# EAGLE board SCHEMATIC_EP (EAGLE 9.6.2)
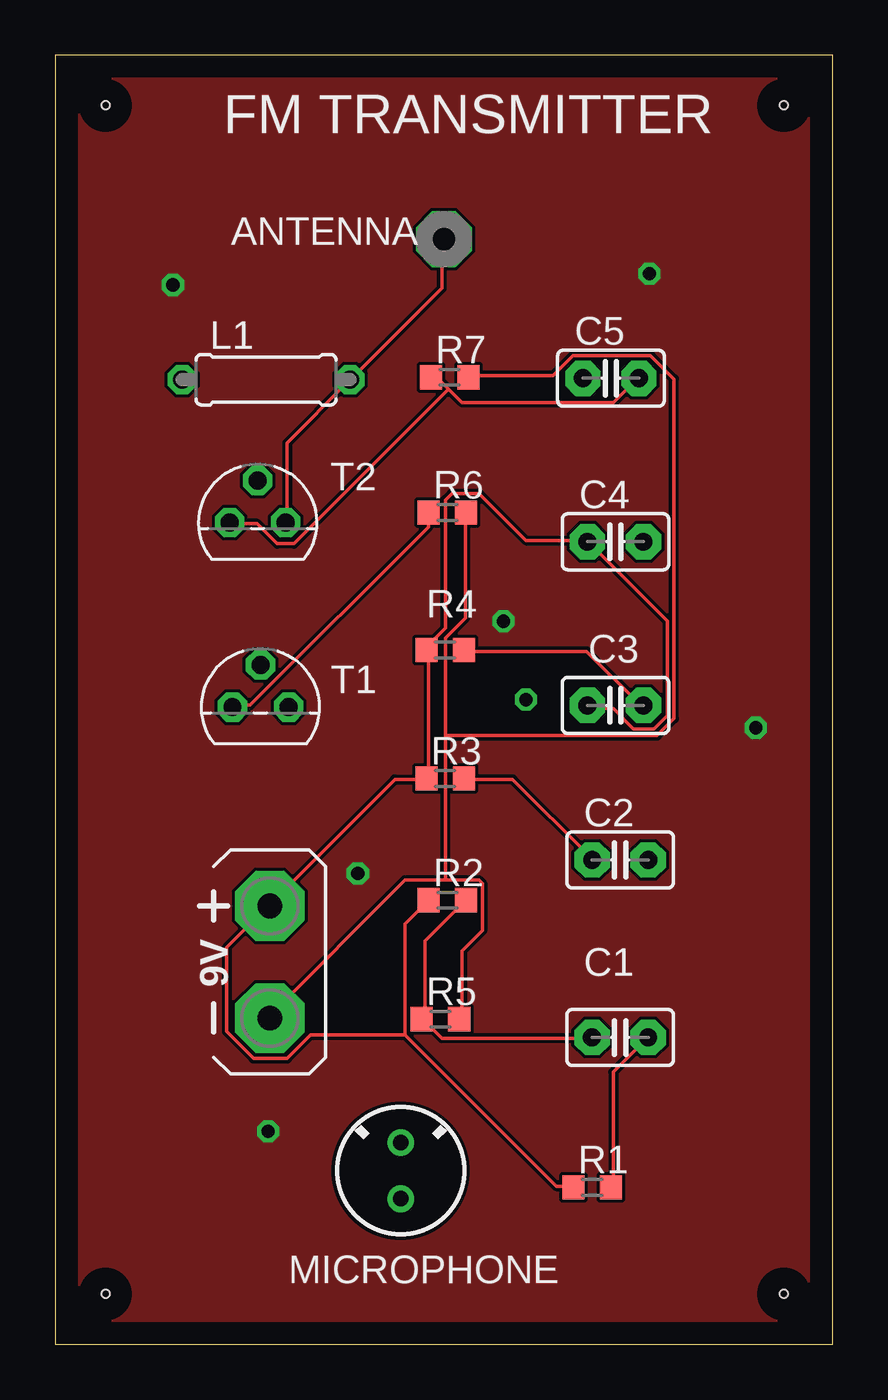
[diagram p0: board, top side]
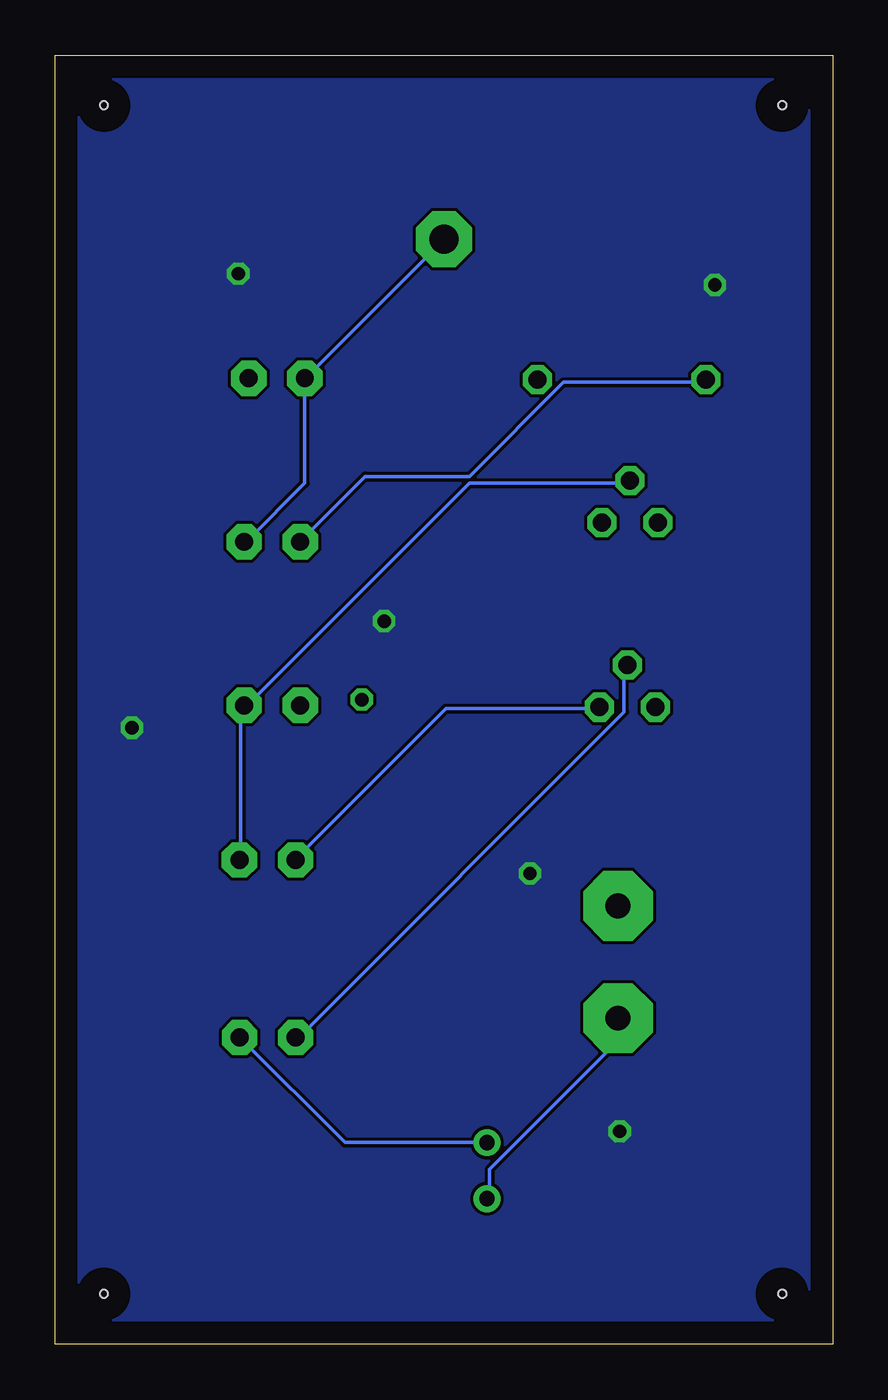
[diagram p1: board, bottom side, seen from below]

Size 35.23 x 58.41 mm. Coordinates in mm from the lower left corner, seen from the top.
Outline: 0,0 35.23,0 35.23,58.41 0,58.41 0,0
Copper layers (1*16): Top 0.035mm / dielectric 1.5mm / Bottom 0.035mm
Design rules "default": minimum track width 6mil, minimum drill 0.35mm, track to track 6mil, track to pad 6mil, pad to pad 6mil, via to via 6mil, smd to smd 6mil, copper to edge 40mil, drill to drill 6mil, minimum pad ring 10mil, minimum via ring 8mil, stop-mask expansion 4mil, vias tented up to drill 0mil, thermal gap 10mil
Holes 0.35 mm at 2.29,56.13 33.02,56.13 33.02,2.29 2.29,2.29

## Footprints (pad centres in the part's own frame; a part is rotated, then mirrored left to right if it is on the bottom)
AB9V = drill 1.118 pad 3.15 octagon: + 0,2.54; - 0,-2.54
PAD-01 = drill 1.321 pad 2.54 octagon: 1 0,0
C2.5-2 = drill 0.813 pad 1.6 octagon: 1 -1.27,0; 2 1.27,0
0207/7 = drill 0.813 octagon: 1 -3.81,0; 2 3.81,0
F6050AP = drill 0.7 pad 1.2: 1 0,1.27; 2 0,-1.27
R0603 = smd 1 x 1.1: 1 -0.85,0; 2 0.85,0
TO92 = drill 0.813 octagon: 1 1.27,0; 2 0,1.905; 3 -1.27,0

## Placement (x,y rotation side)
9V  AB9V  [AB9V]  9.73,17.32 0 top
ANTENNA  10"  [PAD-01]  17.61,50.07 0 top
C1  0.1uF  [C2.5-2]  25.6,13.9 0 top
C2  0.1uF  [C2.5-2]  25.61,21.95 0 top
C3  0.01uF  [C2.5-2]  25.39,28.95 0 top
C4  20pF  [C2.5-2]  25.39,36.36 0 top
C5  4.7pF  [C2.5-2]  25.19,43.77 0 top
L1  0.1uH  [0207/7]  9.56,43.71 0 top
MICROPHONE  ELECTRET_MICROPHON-F6050AP  [F6050AP]  15.66,7.87 180 top
R1  10K  [R0603]  24.33,7.11 0 top
R2  1M  [R0603]  17.77,20.12 0 top
R3  10K  [R0603]  17.67,25.63 0 top
R4  10K  [R0603]  17.67,31.46 0 top
R5  100K  [R0603]  17.46,14.74 0 top
R6  100  [R0603]  17.77,37.69 0 top
R7  1K  [R0603]  17.88,43.81 0 top
T1  2N3904  [TO92]  9.3,28.87 0 top
T2  2N3904  [TO92]  9.18,37.23 0 top

## Library data of the parts
9V = battery
ANTENNA = discrete
C1-C5 = capacitor-wima
L1 = rcl; SPICEPREFIX: L
MICROPHONE = microphon
R1-R7 = rcl; SPICEPREFIX: R
T1 T2 = transistor

## Nets
0: 9V.- MICROPHONE.1 R5.2 R6.2 R7.2
N$1: C1.1 R2.2 R5.1 T1.2
N$2: R6.1 T1.3
N$3: C2.1 R3.2 T1.1
N$4: 9V.+ C3.1 C4.1 L1.1 R1.1 R2.1 R3.1 R4.1
N$5: C1.2 MICROPHONE.2 R1.2
N$7: C5.2 R7.1 T2.3
N$8: C2.2 C3.2 R4.2 T2.2
N$9: ANTENNA.1 C4.2 C5.1 L1.2 T2.1

## Tracks (layer width: path | path; a pad name or v marks a point on that pad's centre or on a via)
0
  Top 0.152: 17.68,21.03 15.85,21.03 9.75,14.94 9V.- | 17.68,21.03 19.2,21.03 19.36,20.88 19.36,18.75 18.44,17.83 18.44,14.78 R5.2 | 17.68,21.03 17.68,27.58 | 17.68,27.58 17.68,32 18.59,32.92 18.59,37.64 R6.2 | 17.68,27.58 27.28,27.58 28.04,28.35 28.04,43.74 26.98,44.81 23.47,44.81 22.55,43.89 18.75,43.89 R7.2
  Bottom 0.152: MICROPHONE.1 15.54,6.71 15.54,7.92 9.75,13.72 9.75,14.78 9V.-
GND  (via drill 0.6)
  other vias: 20.32,32.77 31.75,27.94 9.65,9.65 13.72,21.34 5.33,48.01 26.92,48.51
  pour Top: -1.27,59.69 -1.27,-1.27 36.83,-1.27 36.83,59.69
  pour Bottom: -2.54,60.96 -2.54,-2.54 38.1,-2.54 38.1,60.96
N$1
  Top 0.152: R2.2 18.59,20.12 16.76,18.29 16.76,14.78 R5.1 16.76,14.63 17.53,13.87 24.23,13.87 C1.1
  Bottom 0.152: T1.2 9.45,30.63 9.45,28.65 24.23,13.87 C1.1
N$2
  Top 0.152: R6.1 16.92,37.64 16.92,37.03 8.84,28.96 8.08,28.96 T1.3
N$3
  Top 0.152: R3.2 18.59,25.6 20.73,25.6 24.23,22.1 C2.1
  Bottom 0.152: T1.1 10.67,28.8 17.53,28.8 24.23,22.1 C2.1
N$4
  Top 0.152: C3.1 24.23,28.8 25.3,28.8 26.21,27.89 27.13,27.89 27.74,28.5 27.74,32.77 24.23,36.27 C4.1 24.08,36.42 21.34,36.42 19.2,38.56 17.98,38.56 17.68,38.25 17.68,32.46 16.76,31.55 R4.1 16.92,31.39 16.92,25.76 R3.1 16.76,25.6 15.39,25.6 9.75,19.96 9V.+ 9.6,19.81 7.77,17.98 7.77,14.17 8.99,12.95 10.52,12.95 11.58,14.02 15.85,14.02 | 15.85,14.02 22.71,7.16 23.47,7.16 R1.1 | 15.85,14.02 15.85,19.05 R2.1
  Bottom 0.152: L1.1 5.79,43.59 12.19,43.59 16.46,39.32 21.18,39.32 24.08,36.42 C4.1
N$5
  Top 0.152: R1.2 25.3,7.16 25.3,12.34 26.82,13.87 C1.2
  Bottom 0.152: MICROPHONE.2 15.7,9.14 22.1,9.14 26.82,13.87 C1.2
N$7
  Top 0.152: 17.83,43.28 18.44,42.67 25.3,42.67 26.36,43.74 C5.2 | 17.83,43.28 17.37,43.74 17.07,43.74 R7.1 | 17.83,43.28 10.82,36.27 10.06,36.27 9.14,37.19 7.92,37.19 T2.3
N$8
  Top 0.152: R4.2 18.59,31.39 24.08,31.39 26.52,28.96 C3.2
  Bottom 0.152: T2.2 9.3,39.01 16.46,39.01 26.52,28.96 C3.2 26.67,28.8 26.82,28.65 26.82,22.1 C2.2
N$9
  Top 0.152: T2.1 10.52,37.34 10.52,40.84 13.26,43.59 L1.2 13.41,43.74 17.53,47.85 17.53,49.99 ANTENNA.1
  Bottom 0.152: C4.2 26.52,36.42 23.93,39.01 23.93,43.74 C5.1 23.77,43.89 17.68,49.99 ANTENNA.1
N$11  (via drill 0.6)
  other vias: 21.34,29.21

## Text on the board
tPlace: FM TRANSMITTER